# Altium PCB PCB1.PcbDoc
Units mil, origin at the board's own origin, x right, y up, seen from the top; angles counter-clockwise.
Board outline 1755 x 925 mil, 2 copper layers (Top Layer, Bottom Layer); 23 components, 44 nets, 146 pads, 41 vias.
Unrouted connection lines stored in the file: 15.
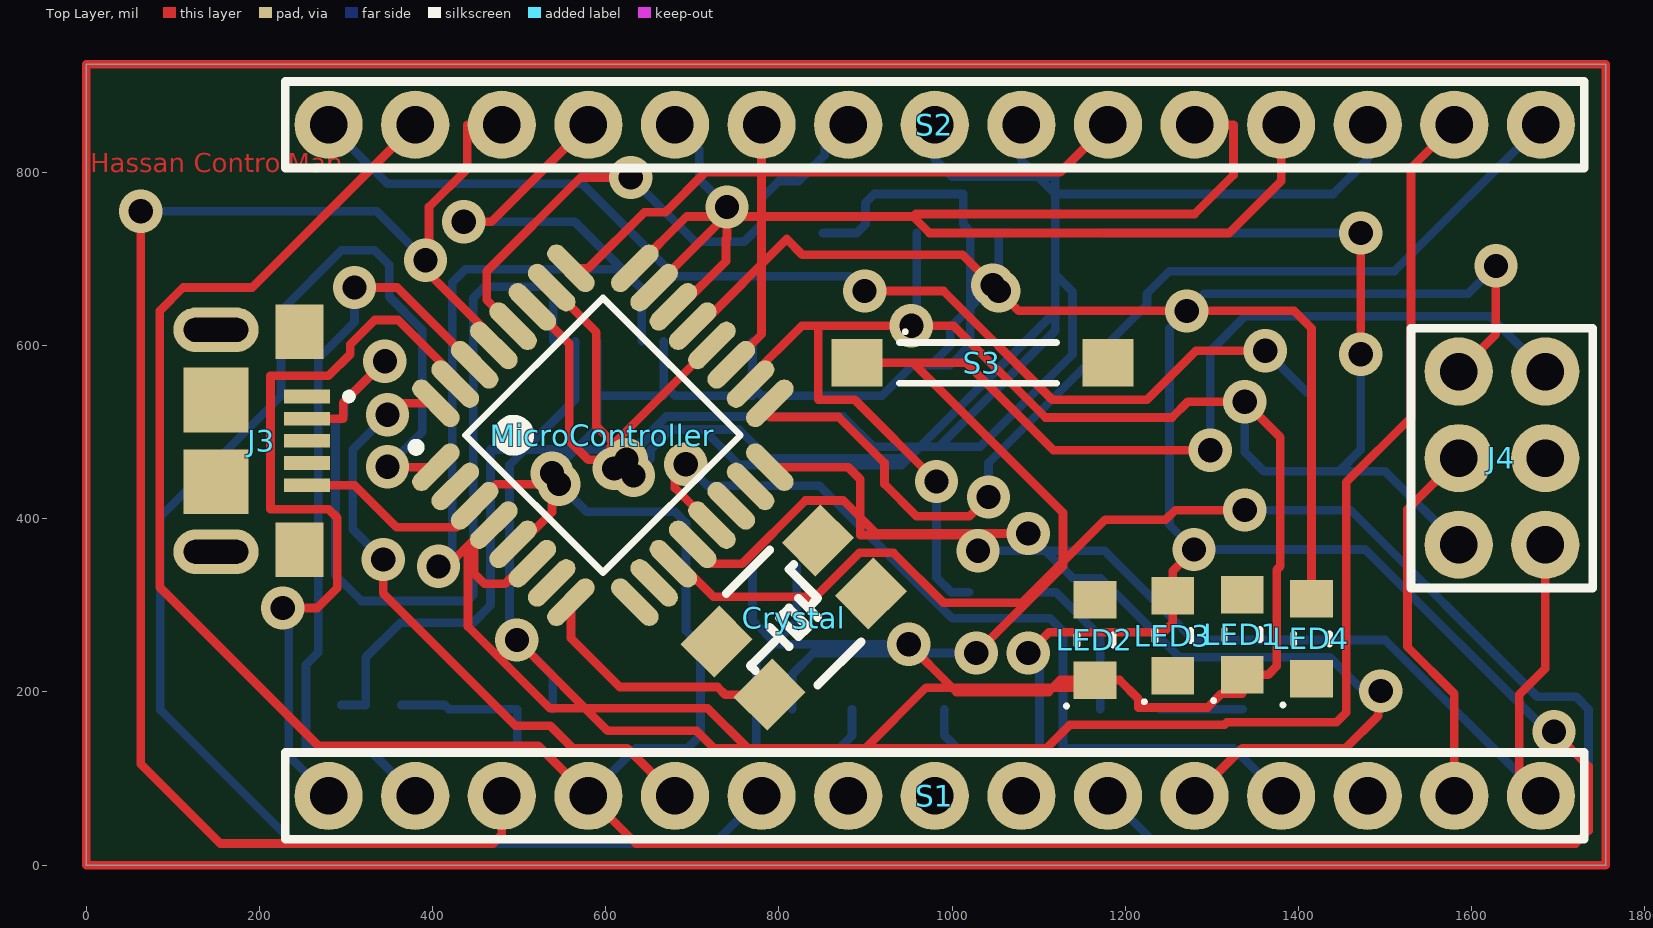
[diagram p0: Top Layer view]
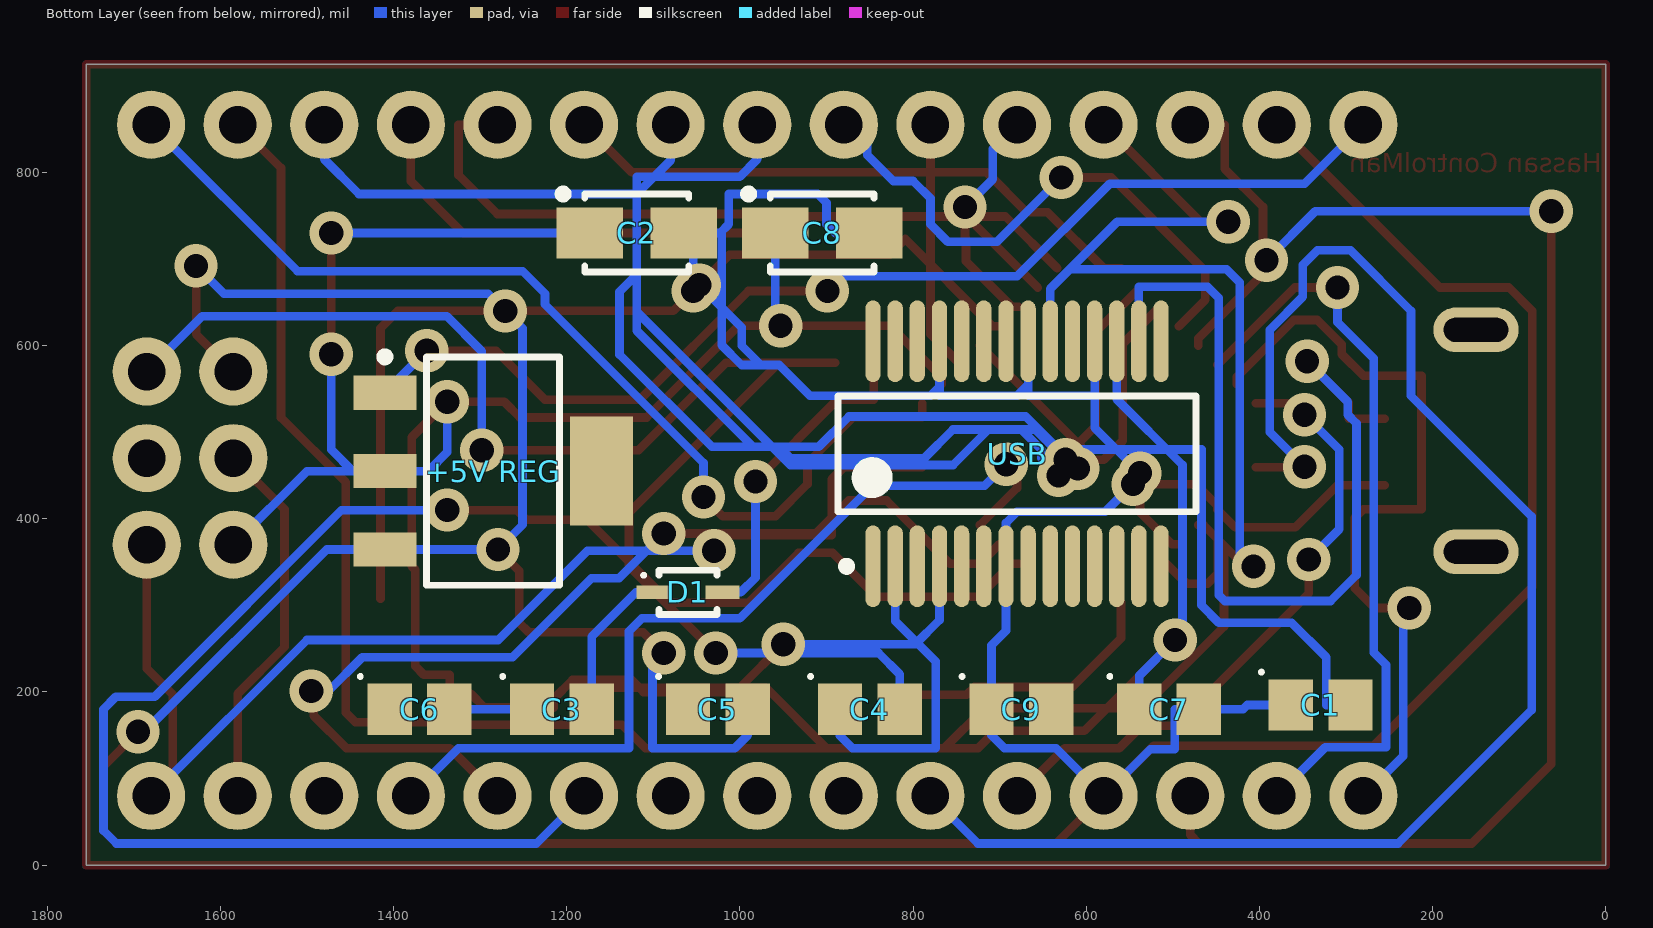
[diagram p1: Bottom Layer view, seen from below]

## Layer stack, top to bottom
Top Solder: solder mask 0.4, Solder Resist, Dk 3.5
Top Layer: signal copper 1.4
Dielectric 1: dielectric 12.6, FR-4, Dk 4.8
Bottom Layer: signal copper 1.4
Bottom Solder: solder mask 0.4, Solder Resist, Dk 3.5

## Board outline
0,0 1755,0 1755,925 0,925

## Design rules (kind name [scope] priority, off if disabled: settings)
Clearance [All] p1: gap=10 ignorepadtopadclearanceinfootprint=FALSE
PolygonConnect [All] p1: connectstyle=Relief reliefconductorwidth=10 reliefentries=4 polygonreliefangle="90 Angle" airgapwidth=10
RoutingVias [All] p1: holewidth=28 width=50 viastyle="Through Hole" minholewidth=28 minwidth=50 maxholewidth=28 maxwidth=50
SolderMaskExpansion [All] p1: expansion=4 istentingtop=FALSE
SupplyNets "Schematic Supply Nets_4" [InNet('AGND')] p1: voltage=0.000
SupplyNets "Schematic Supply Nets_3" [InNet('3V3')] p2: voltage=0.000
SupplyNets "Schematic Supply Nets_2" [InNet('VUSB')] p3: voltage=0.000
SupplyNets "Schematic Supply Nets_1" [InNet('VIN')] p4: voltage=0.000
SupplyNets "Schematic Supply Nets" [InNet('AVCC')] p5: voltage=0.000
Width [All] p1: maxlimit=10 minlimit=10 preferedwidth=10
30 further rules are at their usual default settings.

## Components (designator, comment, footprint, x,y, rotation, side; value= is the part's Value field where it differs from the comment)
"+5V REG" "LM1117MP-5.0/NOPB, Low Dropout Voltage Regulator, 1.5A, 5 V ±1%, 4-Pin SOT-223" SOT230P700X180-4N 1285,455 r180 bottom
C1 "100nF Ceramic Multilayer Capacitor_1" CAPCP2012X09N 329.45,185 r180 bottom
C2 "Capacitor SMT Tantalum" "CASE A - 3216X18" 1119.13,730 r180 bottom value=4.7µF
C3 "100nF Ceramic Multilayer Capacitor_1" CAPCP2012X09N 1205.55,180 r180 bottom
C4 "100nF Ceramic Multilayer Capacitor_1" CAPCP2012X09N 850,180 r180 bottom
C5 "C0805C180J5GACTU" CAPCP2012X09N 1025.55,180 r180 bottom
C6 "C0805C180J5GACTU" CAPCP2012X09N 1370,180 r180 bottom
C7 "100nF Ceramic Multilayer Capacitor_1" CAPCP2012X09N 504.45,180 r180 bottom
C8 "Capacitor SMT Tantalum" "CASE A - 3216X18" 905,730 r180 bottom value=4.7µF
C9 "100nF Ceramic Multilayer Capacitor_1" CAPCP2012X09N 675,180 r180 bottom
Crystal "Aker 16MHz Crystal SMT" "Aker S5C Crystal" 845,375 r45 top value=16MHz
D1 "Panasonic DB2J20900L Schottky Diode, 0.5A, 20V, 2.4ns, 2-Pin SMini2 F5 B" DIOM1712X07N 1060,315 r180 bottom
J3 "2013499-1" TE_2013499-1 150,490 r270 top
J4 "Programming Headers Dual Row" "ISP HEADER" 1130,-325 r90 top
LED1 "Kingbright Red LED, 100 mcd 120 ° 0805" LED1913X12NRED 1335,266.26 r90 top
LED2 "Kingbright Green LED, 70 mcd 120 ° 0805" LED1913X12NGREEN 1165,260 r90 top
LED3 "Kingbright Red LED, 100 mcd 120 ° 0805" LED1913X12NRED 1255,265 r90 top
LED4 "Kingbright Blue LED, 60 mcd 120 ° 0805" LED1913X12NBLUE 1415,261.26 r90 top
MicroController "ATMEGA328P-AU" TQFP80P900X900X120-32N 596.76,496.43 r45 top
S1 "connector;str header;single row;.1 cont centers;.095 tail;gold or gtx;36 contact" Header 280,80 r0 top
S2 "connector;str header;single row;.1 cont centers;.095 tail;gold or gtx;36 contact" Header 280,855 r0 top
S3 "Button Tactile Switch, NO 0.05 A 0.8mm" Button8014X17N 1030,580 r0 top
USB "FT232RL, Universal Asynchronous Receiver & Transmitter 3MBd, 28-Pin, SSOP" SOP65P780X200-28N 680,475 r90 bottom

## Footprints (in the part's own frame and the unit in brackets; to place one, negate y for a bottom-side part, rotate by r counter-clockwise, add the part's x,y. Pads: shape width x height; smd on the part's side, far side on the other; paste and mask are expansions set on the pad)
"Aker S5C Crystal" [mm]
  rect 1.6x1.4 smd: 1(0,0) 2(-4.2,0) 3(0,-2.2) 4(-4.2,-2.2)
  round 0.254 on Top Overlay: 5(-3,-2.4)
  silkscreen extent -4,-3 -1,0.8, body extent -4.7,-2.8 0.5,0.6, height 1
Button8014X17N [mm] "Chip Inductor, 2-Leads, Body 8.00x1.40mm, IPC Medium Density"
  rect 1.5x1.4 smd: 1(-3.556,0) 2(3.81,0)
  silkscreen extent -2.3,-0.6 2.3,0.96, body extent -3.79,-1.92 4.21,1.78, height 2.5
CAPCP2012X09N [mm] "Chip Capacitor, 2-Leads, Body 2.00x1.25mm, IPC Medium Density"
  rect 1.3x1.5 smd: 1(-0.875,0) 2(0.875,0)
  silkscreen extent -1.79,0.91 -1.69,1.01, body extent -1.05,-0.57 0.95,0.68, height 0.78
"CASE A - 3216X18" [mm] "Molded Capacitor, 2-Leads, Body 3.2x1.6mm, IPC Medium Density"
  rect 1.95x1.5 smd: 1(-1.375,0) 2(1.375,0)
  silkscreen extent -2.28,-1.14 1.52,1.27, body extent -1.52,-0.76 1.65,0.84, height 1.77
DIOM1712X07N [mm] "Molded Diode, 2-Leads, Body 1.70x1.25mm, IPC Medium Density"
  rect 1x0.4 smd: 1(-1.016,0) 2(1.016,0)
  silkscreen extent -1.35,-0.65 0.85,0.65, body extent -0.9,-0.45 0.9,0.45, height 0.8
Header [mm] "SIL Header"
  round 2 hole 1.1: 1(0,0) 2(2.54,0) 3(5.08,0) 4(7.62,0) 5(10.16,0) 6(12.7,0) 7(15.24,0) 8(17.78,0) 9(20.32,0) 10(22.86,0) 11(25.4,0) 12(27.94,0) 13(30.48,0) 14(33.02,0) 15(35.56,0)
  silkscreen extent -1.27,-1.27 36.83,1.27, body extent -1.33,-1.35 36.93,1.35, height 8.6
"ISP HEADER" [mm] "SIL Header for programming"
  round 2 hole 1.1: 1(17.653,-14.097) 2(17.653,-11.557) 3(20.193,-14.097) 4(20.193,-11.557) 5(22.733,-14.097) 6(22.733,-11.557)
  silkscreen extent 16.38,-15.49 24,-10.16, body extent 16.38,-15.37 24,-10.29, height 8
LED1913X12NBLUE [mm] "LED 2-Leads, Body 1.90x1.32mm, IPC Medium Density"
  rect 1.1x1.25 smd: 1(-1.175,0) 2(1.175,0)
  silkscreen extent -1.99,-0.53 0.15,0.89, body extent -1,-0.62 1.02,0.62, height 1.1
LED1913X12NGREEN [mm] "LED 2-Leads, Body 1.90x1.32mm, IPC Medium Density"
  rect 1.1x1.25 smd: 1(-1.175,0) 2(1.175,0)
  silkscreen extent -1.99,-0.53 0.15,0.89, body extent -1.01,-0.62 1.01,0.63, height 1.1
LED1913X12NRED [mm] "LED 2-Leads, Body 1.90x1.32mm, IPC Medium Density"
  rect 1.1x1.25 smd: 1(-1.175,0) 2(1.175,0)
  silkscreen extent -1.99,-0.53 0.15,0.89, body extent -1.02,-0.43 1.04,0.47, height 0.85
SOP65P780X200-28N [mm] "SOP, 28-Leads, Body 10.20x5.30mm, Pitch 0.65mm, IPC Medium Density"
  oval 2.4x0.45 smd: 1(-3.3,4.225) 2(-3.3,3.575) 3(-3.3,2.925) 4(-3.3,2.275) 5(-3.3,1.625) 6(-3.3,0.975) 7(-3.3,0.325) 8(-3.3,-0.325) 9(-3.3,-0.975) 10(-3.3,-1.625) 11(-3.3,-2.275) 12(-3.3,-2.925) 13(-3.3,-3.575) 14(-3.3,-4.225) 15(3.3,-4.225) 16(3.3,-3.575) 17(3.3,-2.925) 18(3.3,-2.275) 19(3.3,-1.625) 20(3.3,-0.975) 21(3.3,-0.325) 22(3.3,0.325) 23(3.3,0.975) 24(3.3,1.625) 25(3.3,2.275) 26(3.3,2.925) 27(3.3,3.575) 28(3.3,4.225)
  silkscreen extent -3.42,-5.25 1.7,5.25, body extent -3.91,-5.1 3.91,5.1, height 2
SOT230P700X180-4N [mm] "SOT223, 4-Leads, Body 6.50x7.00mm (avg), Pitch 2.30mm, IPC Medium Density"
  rect 1.85x1 smd: 1(-3.175,2.3) 2(-3.175,0) 3(-3.175,-2.3)
  rect 1.85x3.2 smd: 4(3.175,0)
  silkscreen extent -3.3,-3.35 1.95,3.47, body extent -3.8,-3.12 3.29,3.38, height 1.65
TE_2013499-1 [mm]
  rect 0.4x1.35 smd: 1(-1.3,2.675) 2(-0.65,2.675) 2(0,2.675) 4(0.65,2.675) 5(1.3,2.675)
  rect 1.6x1.4 smd: SH1(-3.2,2.45) SH4(3.2,2.45)
  rect 1.9x1.9 smd: SH2(-1.2,0) SH3(1.2,0)
  oval 1.31x2.5 hole 0.71 slot 1.9 at 90 deg: SH5(3.255,0) SH6(-3.255,0)
  silkscreen extent -1.4,3.8 -1.2,4, body extent -4,-2.49 4,3.11, height 2.76
TQFP80P900X900X120-32N [mm] "TQFP, 32-Leads, Body 7.00x7.00mm, Pitch 0.80mm, IPC Medium Density"
  oval 1.75x0.55 smd: 1(-4.125,2.8) 2(-4.125,2) 3(-4.125,1.2) 4(-4.125,0.4) 5(-4.125,-0.4) 6(-4.125,-1.2) 7(-4.125,-2) 8(-4.125,-2.8) 17(4.125,-2.8) 18(4.125,-2) 19(4.125,-1.2) 20(4.125,-0.4) 21(4.125,0.4) 22(4.125,1.2) 23(4.125,2) 24(4.125,2.8)
  oval 0.55x1.75 smd: 9(-2.8,-4.125) 10(-2,-4.125) 11(-1.2,-4.125) 12(-0.4,-4.125) 13(0.4,-4.125) 14(1.2,-4.125) 15(2,-4.125) 16(2.8,-4.125) 25(2.8,4.125) 26(2,4.125) 27(1.2,4.125) 28(0.4,4.125) 29(-0.4,4.125) 30(-1.2,4.125) 31(-2,4.125) 32(-2.8,4.125)
  silkscreen extent -4.25,-2.85 2.85,3.75, body extent -4.44,-4.5 4.56,4.5, height 1.6

## Part data
"+5V REG": library part LM1117MP-5.0, Manufacturer="Texas Instruments", Maximum Input Voltage=15V, Output Voltage=5V, Supply Current=1.5Amps, Created By="R Kanjee", Datasheet URL=http://za.rs-online.com/web/p/low-dropout-voltage-regulators/5339583/, Date Created="26 February 2015", RS Stock No.=533-9583
C1 C3 C4 C7 C9: "AVX 0805 Standard 100nF Ceramic Multilayer Capacitor, 50 V dc X7R Dielectric ±10% SMD", Capacitance=100nF, Manufacturer=AVX, Package=0805, Voltage=50V, Creator="Ritesh Kanjee", Datasheet URL=http://za.rs-online.com/web/p/ceramic-multilayer-capacitors/4646688/, Date Created="18 February 2015", RS Stock No.=464-6688
C2 C8: library part "4.7µF Tant RS 496-3545", "Capacitor,tantalum,SMT,16V,4.7uF,10%,A-case", Package=3216-18, Tolerance=10%, Voltage=16V, ComponentLink1Description="Supplier Website", ComponentLink1URL=http://za.rs-online.com/web/search/searchBrowseAction.html?method=getProduct&R=4963545, ComponentLink2Description="RS Data sheet", ComponentLink2URL=http://docs-europe.origin.electrocomponents.com/webdocs/04ed/0900766b804ed4cc.pdf, LatestRevisionDate=28-April-2010, Part Originator="H Theron", Publisher=DPSS, RS Stock Nr.=496-3545
C5 C6: library part "18pF Ceramic Multilayer Capacitor, 50 V dc C0G Dielectric ±5% SMD", "18pF Ceramic Multilayer Capacitor, 50 V dc C0G Dielectric ±5% SMD", Capacitance=18pF, Manufacturer=Kemet, Package=0805, Voltage=50V, Creator="Ritesh Kanjee", Datasheet URL=http://za.rs-online.com/web/p/ceramic-multilayer-capacitors/6480935/?searchTerm=C0805C180J5GACTU&relevancy-data=636F3D3226696E3D4931384E4B6E6F776E41734D504E266C753D656E266D6D3D6D61746368616C6C7061727469616C26706D3D5E5B5C707B4C7D5C707B4E647D2D2C2F255C2E5D2B2426706F3D313326736E3D592673743D4D414E5F504152545F4E554D4245522677633D424F5448267573743D4330383035433138304A35474143545526, Date Created="18 February 2015", RS Stock No.=648-0935
Crystal: library part "Aker  C5S-16.000-12-3030-X", "Aker S5C SMT Crystal", Frequency Stability=+/-30ppm, Load Capacitance=12pF, Manufacturer=Aker, Manufacturer Part #=C5S-16.000-12-3030-X, Package="3.2x5mm SMD", Creator="R Kanjee", HelpURL=http://za.rs-online.com/web/p/crystal-units/6719488/, RS="RS 671-9488", RS Stock Nr.=671-9488, Supplier=RS
D1: library part "Schottky Diode, 0.5A, 20V, 2.4ns, 2-Pin SMini2 F5 B", Manufacturer=Panasonic, Manufacturer Part No.=DB2J20900L, Maximum Continuous Forward Current=0.5A, Peak Reverse Repetitive Voltage=20V, Created By="R Kanjee", Datasheet=http://docs-europe.electrocomponents.com/webdocs/1398/0900766b813986b3.pdf, Date Created="1 March 2015", RS Stock No.=713-2703
J3: Package=None, Availability=Unavailable, MP=2013499-1, Price=None
J4: library part "Programming ISP, Programming Headers Dual Row", Current Rating="3Amps Continuous", Manufacturer=FCI, Manufacturer Part No.=68000-236HLF, Created By="R Kanjee", Date Created="1 March 2015", RS Stock No.=2509565626
LED1 LED3: Color=RED, Forward Voltage=1.85V, Manufacturer=KingBright, Manufacturer Part No.=KP-2012SRC-PRV, Creator="Ritesh Kanjee", Datasheet URL=http://za.rs-online.com/web/p/visible-leds/4663813/, Date Created="18 February 2015", RS Stock No.=466-3813
LED2: Color=Green, Forward Voltage="2.1 V", Manufacturer=KingBright, Manufacturer Part No.=KP-2012MGC, Creator="Ritesh Kanjee", Datasheet URL=http://za.rs-online.com/web/p/visible-leds/4663778/, Date Created="18 February 2015", RS Stock No.=466-3778
LED4: Color=Blue, Forward Voltage=3.2V, Manufacturer=KingBright, Manufacturer Part No.=KP-2012PBC-A, Creator="Ritesh Kanjee", Datasheet URL=http://za.rs-online.com/web/p/visible-leds/4663784/, Date Created="18 February 2015", RS Stock No.=466-3784
MicroController: "ATMEGA328P-AU, 8 bit AVR Microcontroller 20MHz 1 kB, 32 kB Flash, 2 kB RAM, I2C 32-Pin TQFP", Company="Lumina Inova", Created By="Ritesh Kanjee", Datasheet URL=http://docs-europe.electrocomponents.com/webdocs/0db4/0900766b80db4deb.pdf, Date Created="14 February 2015", RS Stock No.=696-3092
S1 S2: library part "Single row; PCB headers", Current Rating="3Amps Continuous", Manufacturer=FCI, Manufacturer Part No.=68000-236HLF, Created By="R Kanjee", Date Created="1 March 2015", RS Stock No.=2509565626
S3: Manufacturer="C & K", Manufacturer Part No.=B3F1000, Creator="R Kanjee", Date Created="25 February 2015", RS Stock No.=516-255, State="Normaly Open"
USB: library part "FT232RL USB to UART, Universal Asynchronous Receiver & Transmitter 3MBd, 28-Pin, SSOP", Manufacturer="FTDI Chip", Manufacturer Part No.=FT232RL, Creator="R Kanjee", Date Created="03 March 2015", Pin Count=28, RS Stock No.=406-580

## Via types
v1: diameter 50, hole 28, Top Layer to Bottom Layer, 41 vias

## Nets (pads, with @x,y where several pads share a name; then routed paths per layer and width w, separated by ;. In a path a pad name is that pad's centre, name@x,y a point inside that pad or via, vN(x,y) a via of type N, cw(c..) or ccw(c..) an arc to the next point about the centre after c; other vN are vias at no path point)
3V3: C7.1 S2.14 USB.17 | length 2292.7
  Top Layer w10: v1(497.46,260) 602.46,155 705,155 725,135 1109,135 1136.08,162.08 1314.61,162.08 1317.52,165 1444,165 1455,176 1455,442 1530,517 1530,805 S2.14
  Bottom Layer w10: v1(497.46,260) 538.9,218.56 ; C7.1 538.9,218.56 ; USB.17 564.84,537.84 489,462 489,269 538.9,219.1 538.9,218.56
A0: MicroController.23 S2.12 | length 855.8
  Top Layer w10: MicroController.23 737.97,749 955,749 974,730 1320,730 1380,790 S2.12
A1: MicroController.24 S2.11 | length 839
  Top Layer w10: MicroController.24 693.43,749 955,749 958,752 1280,752 1325,797 1325,855 S2.11
A2: MicroController.25 S2.10 | length 688.8
  Top Layer w10: MicroController.25 580,689.21 644.79,754 669,754 715,800 1125,800 S2.10
A3: MicroController.26 S2.9 | length 1143.9
  Top Layer w10: MicroController.26 589,615.54 589,507 632,464 v1(632,450)
  Bottom Layer w10: v1(632,450) 652,470 652,480 675,503 754,503 787,470 942,470 955,483 1032.36,483 1139,589.64 1139,662 1119,682 1119,775 1080,814 S2.9
A4/SDA: MicroController.27 S2.8 | length 1190.5
  Top Layer w10: MicroController.27 558,602 558,490 580,468 v1(624,468)
  Bottom Layer w10: v1(624,468) 659,503 713,503 754,462 942,462 1119,639 1119,795 1000,795 980,815 S2.8
A5/SCL: MicroController.28 S2.7 | length 662.7
  Top Layer w10: MicroController.28 462.73,652.73 462.73,685.73 571,794 v1(629,794)
  Bottom Layer w10: v1(629,794) 703,720 760,720 780,740 780,770 800,790 823,790 853,820 853,855 S2.7
A6: MicroController.19 S2.6 | length 291.6
  Top Layer w10: MicroController.19 780,612.86 S2.6
A7: MicroController.22 S2.5 | length 265.5
  Top Layer w10: MicroController.22 686.2,644.67 739,697.47 739,723 740,724 v1(740,760)
  Bottom Layer w10: S2.5 708,827 708,792 v1(740,760)
AGND: "+5V REG.3" C1.1 C2.2 C3.1 C5.2 C6.2 C7.2 C8.2 C9.1 J3.5 J4.6 LED3.2 LED4.2 MicroController.3 MicroController.5 MicroController.21 S1.4 S2.2 USB.7 USB.18 USB.21 USB.25 | length 8337.4
  Top Layer w10: J3.5 310,438.82 358.82,390 428,390 448.52,410.52 MicroController.3 473.52,440 v1@538,440 ; S2.2 192,667 112,667 85,640 85,321 268,138 522,138 S1.4 635,25 1720,25 1735,40 1735,114 v1(1695,154) ; MicroController.5 501.07,370.46 538,407.38 v1@538,440 ; v1(538,452.7) v1@538,440 ; v1(546,440) v1@538,440 ; MicroController.21 708.47,622.4 809.07,723 827.07,705 1012,705 v1(1047,670) ; v1(1054,663) 1077,640 v1(1271,640) 1395,640 1415,620 LED4.2 ; v1(1088,245) 1112,269 1244,269 1255,280 LED3.2 1255,340 v1(1279.45,364.45) ; J4.6 1628,613 v1(1628,692)
  Bottom Layer w10: C1.1 414,185 419,180 C7.2 498,180 498,134 526,134 S1.4 635,135 694.45,135 709.45,150 C9.1 709.45,254 692.8,270.65 USB.7 692.8,395.2 680,408 578,408 v1(546,440) ; v1(538,452.7) 590.43,505.13 590.43,542 ; USB.18 590.43,542 ; USB.21 667.2,554.8 ; USB.25 769.57,552.43 ; C8.2 890,730 900,740 900,765 910,775 1013,775 1013,740 1023,730 ; C5.2 991.1,150 1006.1,135 1101,135 1101,232 v1(1088,245) ; v1(1047,670) 1021,644 ; v1(1054,663) C2.2@1054,730 ; C2.2 C2.2@1054,730 ; C3.1 C6.2 ; v1(1628,692) 1596,660 1291,660 v1(1271,640) 1251,620 1251,392.9 v1(1279.45,364.45) 1410,364.45 1477.27,364.45 1687.71,154 v1(1695,154) ; 590.43,542 667.2,542 667.2,554.8 ; 667.2,554.8 680,542 769.57,542 769.57,552.43 ; 769.57,552.43 780,542 919,542 954.49,577.49 975.56,577.49 ; 975.56,577.49 998.07,577.49 1021,600.42 1021,644 ; 975.56,577.49 998.07,600 998.07,621.07 1021,644 ; 1021,644 1021,730 1023,730 ; 1023,730 C2.2@1054,730
AREF: C1.2 MicroController.20 S2.13 | length 1970.8
  Top Layer w10: v1(610,458) 606,458 606,483.4 MicroController.20
  Bottom Layer w10: C1.2 323,185 323,240 363,280 447,280 467,300 467,480 610,480 v1(610,458) 670,518 874,518 909,483 985,483 1119,617 1119,775 1440,775 1480,815 S2.13
AVCC: "+5V REG.2" C2.1 C3.2 D1.1 J4.2 LED1.1 LED2.1 MicroController.4 MicroController.6 MicroController.18 S2.4 USB.4 USB.20 | length 4990.7
  Top Layer w10: v1(407,345) 417,345 441,369 ; v1(436,743) 468,743 S2.4 ; MicroController.4 464.73,392.73 MicroController.4@448,376 ; MicroController.6 507.31,348.19 484.13,325 460,325 448,337 MicroController.4@448,376 ; MicroController.18 767.27,563.6 826.67,623 1001.76,623 1107.76,517 1254,517 1272,535 v1(1338,535) 1379,494 1379,345 1375,341 1375,230 1365,220 LED1.1 1335,198 1310.92,198 1295,182.08 1215,182.08 1215,192 1193.26,213.74 LED2.1 ; v1(950,255) 1000,205 ; v1(1472,590) v1(1472,730) ; 441,369 MicroController.4@448,376 ; 441,369 441,275.57 535.57,181 718,181 764,135 900,135 970,205 1000,205 ; 1000,205 1116.26,205 ; 1000,205 1005,200 1111.26,200 1116.26,205 ; 1116.26,205 1125,213.74 LED2.1 ; 1116.26,205 1165,205 LED2.1
  Bottom Layer w10: v1(407,345) 423,361 423,673 438,688 619.17,688 ; v1(436,743) 564.17,743 619.17,688 ; USB.20 641.61,665.55 619.17,688 ; USB.4 769.57,283 797.57,255 v1(950,255) ; D1.1 1120,315 1171.1,263.9 C3.2 ; C2.1 v1(1472,730) ; v1(1338,535) 1338,477 1360,455 1410,455 1447,455 ; v1(1472,590) 1472,480 1447,455 ; J4.2 1500,455 1447,455
D0/RX: MicroController.30 S1.2 | length 878.8
  Top Layer w10: v1(310,667) 359.37,667 MicroController.30
  Bottom Layer w10: v1(310,667) 310,627 268,585 268,245.52 254,231.52 254,136 324,136 S1.2
D1/TX: MicroController.31 S1.1 | length 913.5
  Top Layer w10: v1(227,297) 267,297 290,320 290,401 280,411 213,411 213,565 280,565 305.1,590.1 305.1,601.3 333.28,629.47 360.37,629.47 426.25,563.6 MicroController.31
  Bottom Layer w10: v1(227,297) 234,297 234,126 S1.1
D2: MicroController.32 S1.5 | length 732.6
  Top Layer w10: v1(343,353) 343,313.8 495.8,161 536,161 562,135 625,135 S1.5 ; v1(348,520) 361.32,533.32 MicroController.32
  Bottom Layer w10: v1(343,353) 308,388 308,480 v1(348,520)
D3/PWM: MicroController.1 S1.6 | length 1781.8
  Top Layer w10: v1(348,460) 348.46,459.54 MicroController.1
  Bottom Layer w10: v1(348,460) 388,500 388,618.4 350,656.4 350,693 333,710 295,710 225,640 225,541.85 85.79,402.64 85.79,179.21 240,25 725,25 S1.6
D4: MicroController.2 S1.7
D5/PWM: MicroController.9 S1.8
D6/PWM: MicroController.10 S1.9
D7: MicroController.11 S1.10 | length 1981
  Top Layer w10: MicroController.11 686.2,348.19 724.39,310 842.3,310 892.88,360.57 932.43,360.57 990,303 1081,303 1177,399 1246.88,399 1257.88,410 v1(1337.88,410)
  Bottom Layer w10: S1.10 1235,25 1720,25 1735,40 1735,180 1720.63,194.37 1675.63,194.37 1460,410 v1(1337.88,410)
D8: MicroController.12 S1.11 | length 1205.2
  Top Layer w10: MicroController.12 722.92,348 757.81,348 830.81,421 874.51,421 912.51,383 v1(1088,383) ; S1.11 1335,135 1454.38,135 1492,172.62 1492,198 v1(1495,201)
  Bottom Layer w10: v1(1088,383) 1139.67,331.33 1171.33,331.33 1262.66,240 1436,240 1475,201 v1(1495,201)
D9: MicroController.13 S1.12 | length 1023.6
  Top Layer w10: v1(692.46,463) 683.54,463 680,459.46 680,435.46 MicroController.13
  Bottom Layer w10: v1(692.46,463) 717.46,437.99 847.01,437.99 1000,285 1113,285 1128,270 1128,135 1325,135 S1.12
D10: MicroController.14 S1.13
D11/MOSI: J4.4 MicroController.15 S1.14 | length 436.8
  Top Layer w10: S1.14 1580,198 1526,252 1526,411 J4.4
D12/MISO: J4.1 MicroController.16 S1.15 | length 1398.3
  Top Layer w10: MicroController.16 880,459.54 894,445.54 894,381 1012,381 v1(1030,363) ; S1.15 1655,105 1655,197 1685,227 J4.1
  Bottom Layer w10: v1(1030,363) 1176,363 1279,260 1500,260 S1.15
D13/SCK: J4.3 MicroController.17 S2.15 | length 1185.6
  Top Layer w10: MicroController.17 789.54,517.44 868.89,517.44 922,464.33 922,440 959,403 1020,403 v1(1042,425)
  Bottom Layer w10: v1(1042,425) 1042,464.36 1225.15,647.51 1225.15,660 1251.15,686 1511,686 S2.15
NetC4_1: C4.1 USB.2 | length 376.4
  Bottom Layer w10: USB.2 820.75,282 774,235.25 774,135 870,135 884.45,149.45 C4.1
NetC5_1: C5.1 Crystal.2
NetC6_1: C6.1 Crystal.3
NetJ3_2: J3.2@255.32,515.59 USB.16 | length 1076.6
  Top Layer w10: J3.2@255.32,515.59 297,515.59 297,534 v1(345,582)
  Bottom Layer w10: v1(345,582) 298,535 298,520 288,510 288,335 318,305 440,305 447,312 447,655 460,668 539.25,668 USB.16
NetJ3_3: J3.2@255.32,490 USB.15
NetLED1_2: LED1.2
NetLED2_2: LED2.2
NetLED3_1: LED3.1
NetLED4_1: LED4.1
NetR_LED1_2: USB.23
NetR_LED2_2: USB.22
RESET: C4.2 J4.5 MicroController.29 S1.3 S2.3 S3.1 | length 3561.9
  Top Layer w10: v1(63,755) 63,116.78 154.78,25 470,25 480,35 S1.3 ; v1(392,698.53) 392,686.93 v1@396,682.93 ; MicroController.29 470.79,608.14 v1@396,682.93 ; S2.3 440,855 440,804 396,760 v1@396,682.93 ; S3.1 955,580 ; v1(1028,245) 1128,345 1128,407 955,580 ; v1(1298,479) 1117,479 1016,580 955,580
  Bottom Layer w10: v1(63,755) 335.53,755 v1(392,698.53) ; C4.2 815.55,220.55 840,245 v1(1028,245) ; v1(1298,479) 1298,593.5 1338.5,634 1621,634 J4.5
RX: USB.1
TX: USB.5
VIN: "+5V REG.1" S2.1 | length 1305
  Top Layer w10: v1(899,663) 990.05,663 1115.61,537.44 1225,537.44 1281.56,594 v1(1361.55,594)
  Bottom Layer w10: S2.1 348,787 573,787 680,680 882,680 v1(899,663) ; v1(1361.55,594) 1410,545.55
VUSB: C8.1 C9.2 D1.2 J3.1 | length 634.3
  Top Layer w10: v1(953,623) 845.47,623 845.47,537.44 887.56,537.44 v1(982,443)
  Bottom Layer w10: v1(953,623) 959.13,629.13 C8.1 ; v1(982,443) 982,332 999,315 D1.2
XTAL1: Crystal.1 MicroController.7
XTAL2: Crystal.4 MicroController.8 | length 298.1
  Top Layer w10: MicroController.8 559.87,261.94 616.16,205.65 729.15,205.65 737.97,196.83 Crystal.4
pads on no net: "+5V REG.4" Crystal.5 J3.4 J3.SH1 J3.SH2 J3.SH3 J3.SH4 J3.SH5 J3.SH6 S3.2 USB.3 USB.6 USB.8 USB.9 USB.10 USB.11 USB.12 USB.13 USB.14 USB.19 USB.24 USB.26 USB.27 USB.28
copper on no net: | length 5360
  Top Layer w10: 0,0 0,925 1755,925 1755,0 0,0

## Other copper
Top Layer:
  text "Hassan ControlMan" at 5,800 h22